# Altium PCB DriveSystem_RevA.PcbDoc
Units mil, origin at the board's own origin, x right, y up, seen from the top; angles counter-clockwise.
Board outline 1740 x 1210 mil, 2 copper layers (Top Layer, Bottom Layer); 29 components, 70 nets, 100 pads, 22 vias.
Unrouted connection lines stored in the file: 18.
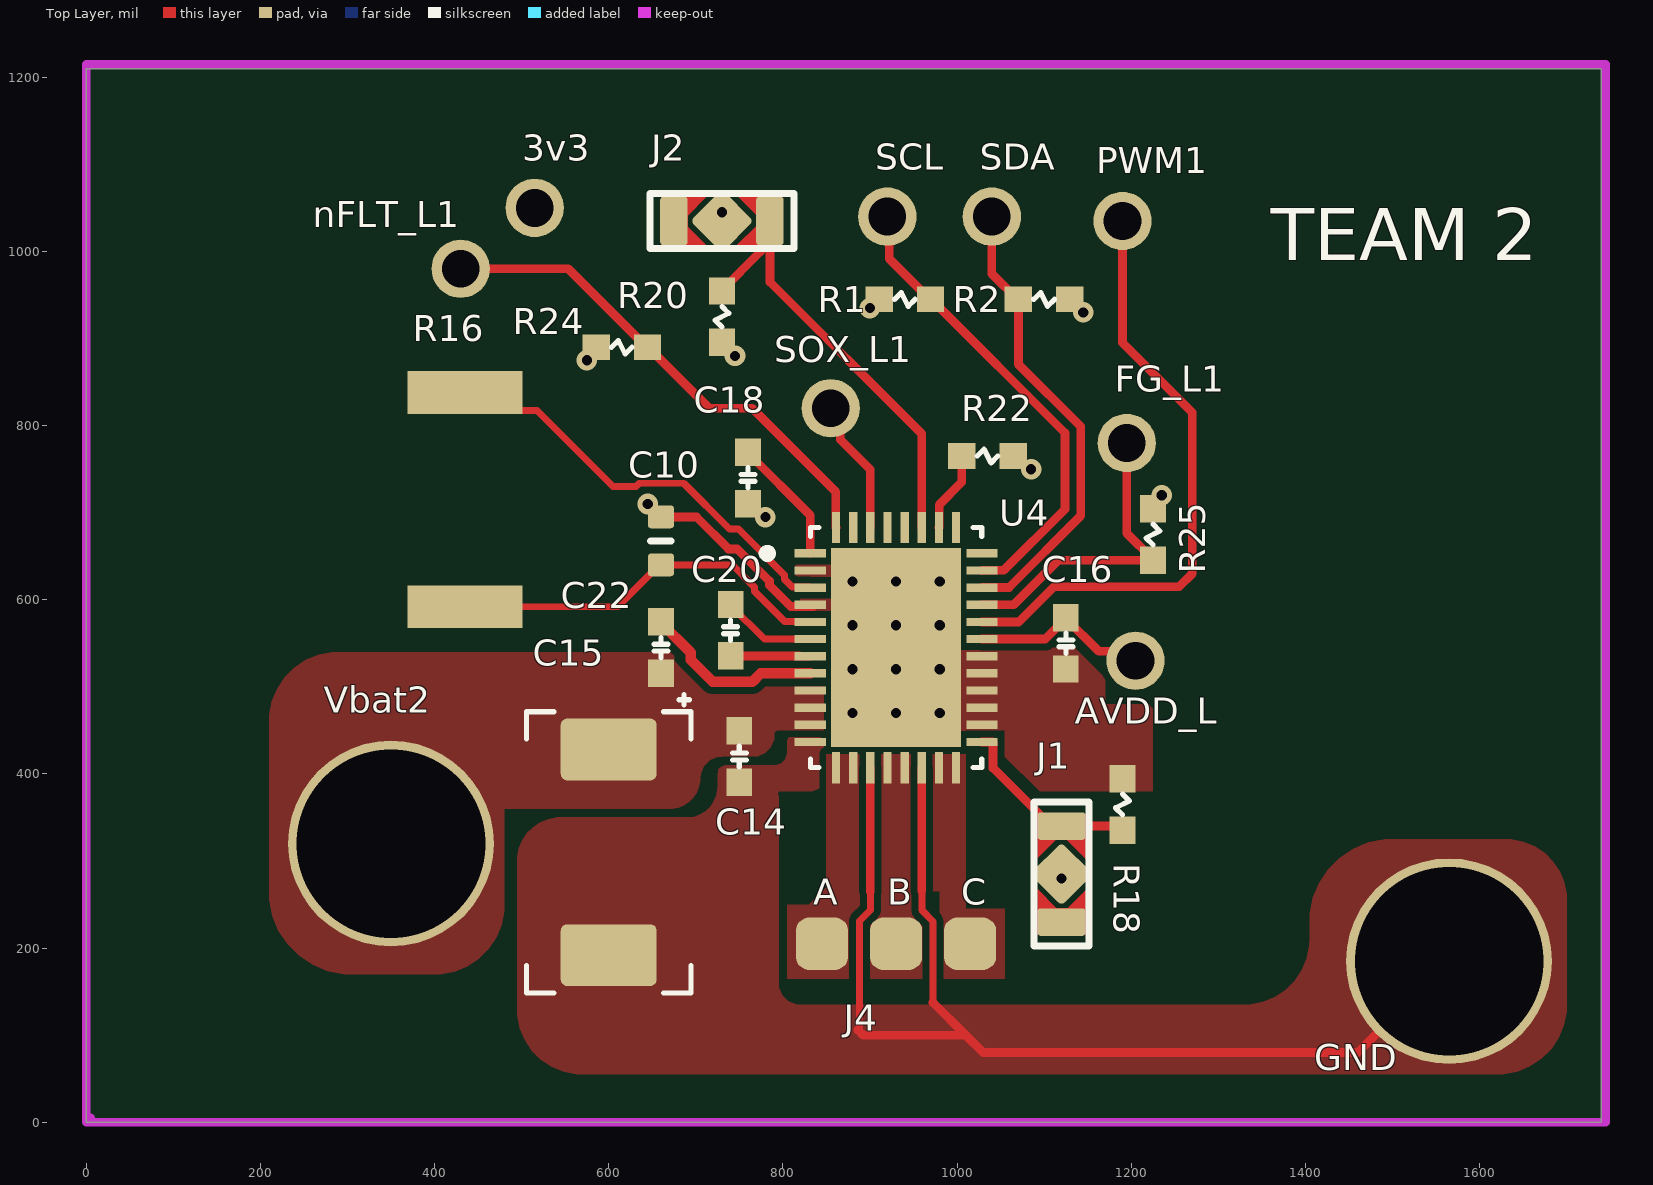
[diagram p0: Top Layer view]
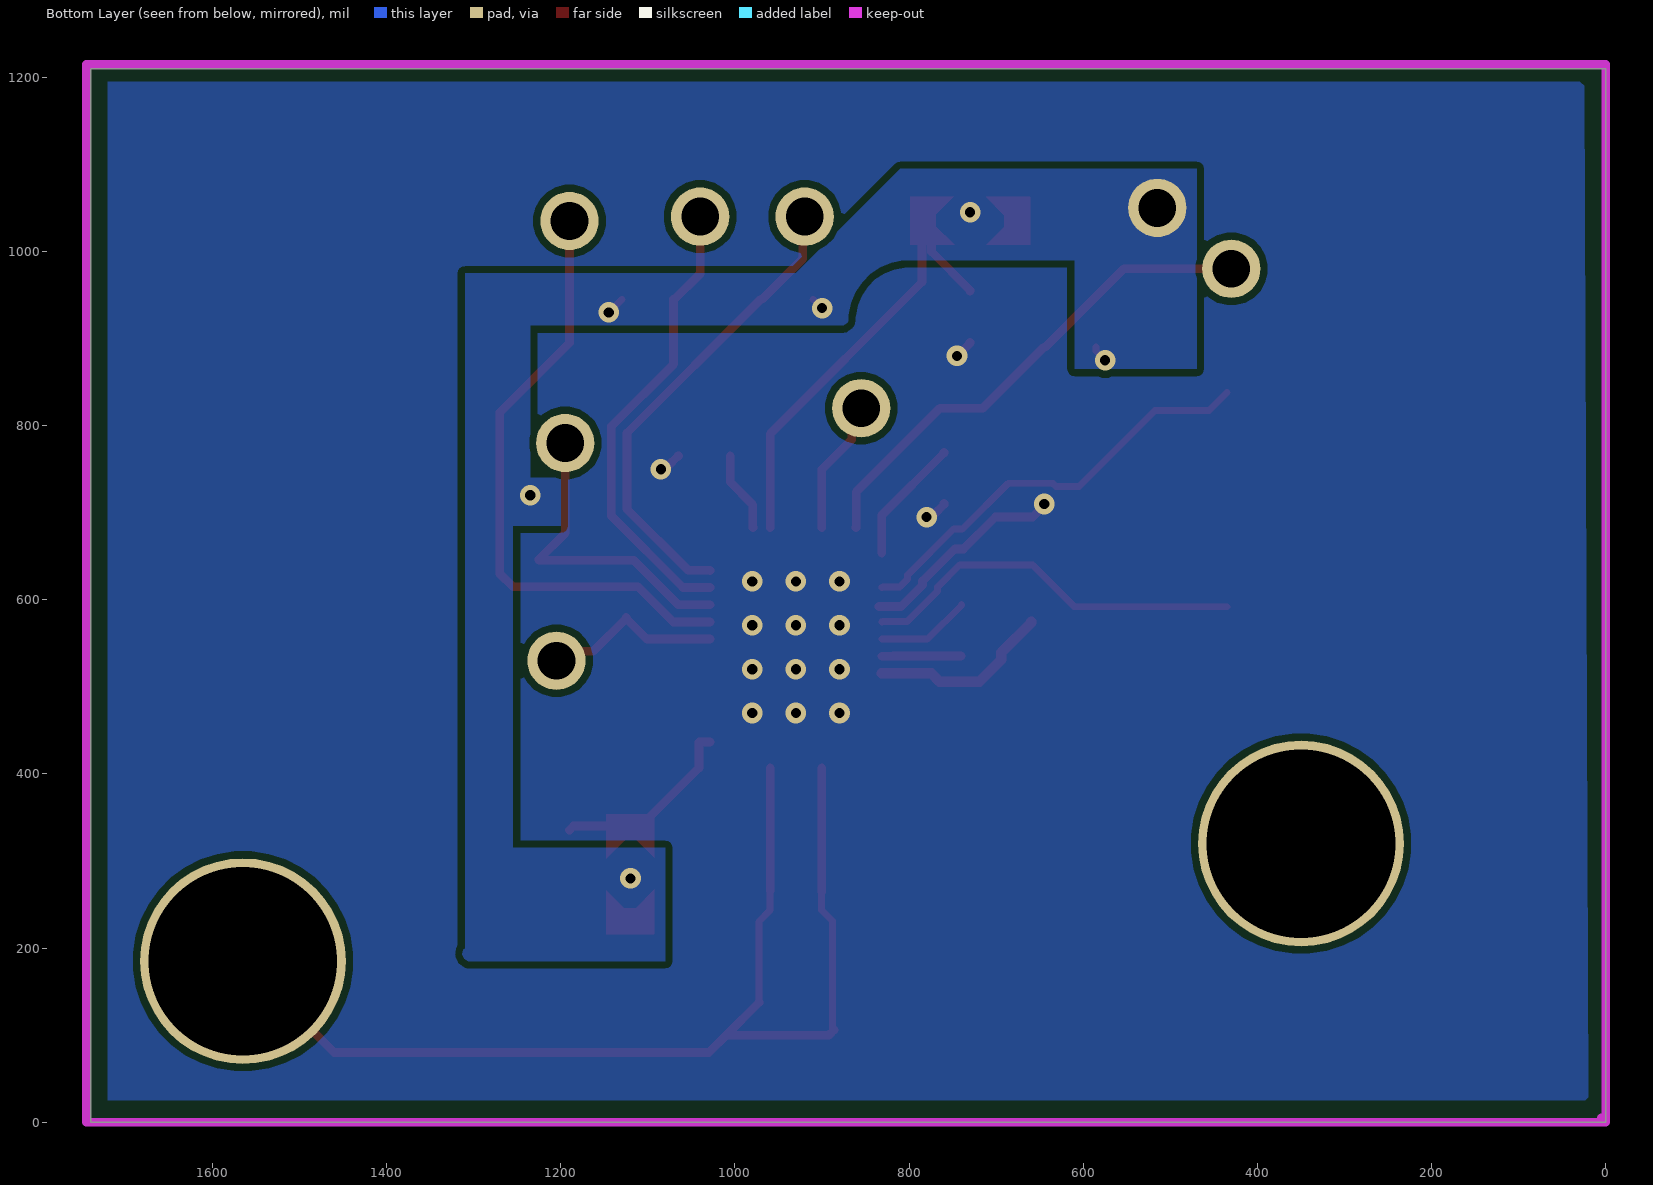
[diagram p1: Bottom Layer view, seen from below]
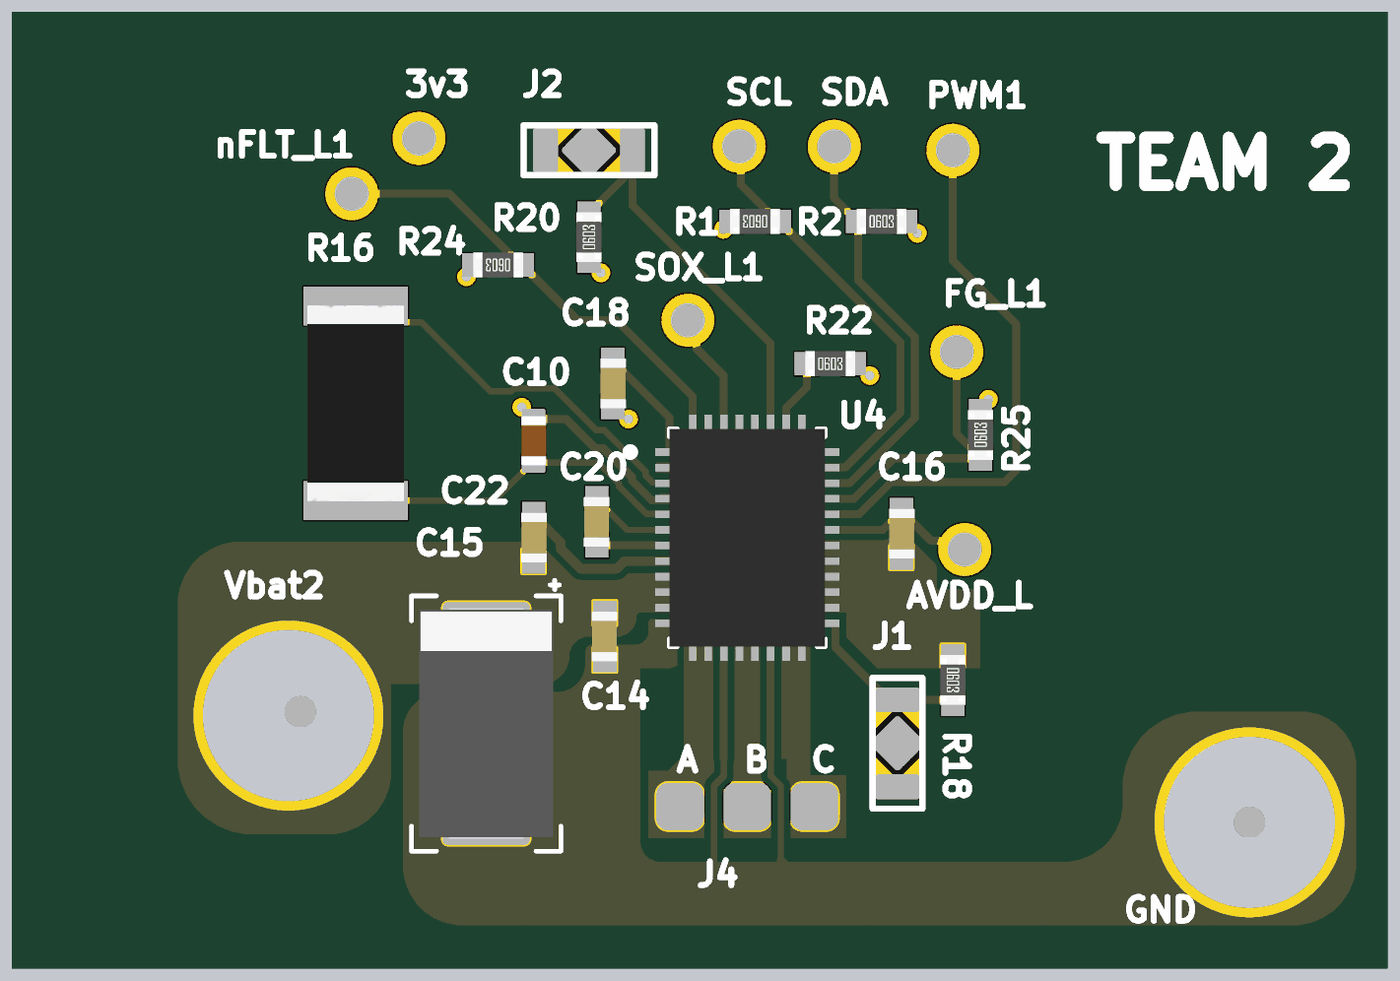
[diagram p2: 3D render of the assembled board from above, using the file's embedded part models]

## Layer stack, top to bottom
Top Solder: solder mask 0.4, Solder Resist, Dk 3.5
Top Layer: signal copper 1.4
Dielectric 1: dielectric 12.6, FR-4, Dk 4.8
Bottom Layer: signal copper 1.4
Bottom Solder: solder mask 0.4, Solder Resist, Dk 3.5

## Board outline
0,0 1740,0 1740,1210 0,1210

## Design rules (kind name [scope] priority, off if disabled: settings)
BoardOutlineClearance [All] p1: gap=7.87 ignorepadtopadclearanceinfootprint=FALSE
Clearance [All] p1: gap=8 ignorepadtopadclearanceinfootprint=TRUE except(10: Arc-Hole Track-Hole SMDPad-Hole THPad-Hole Via-Hole Fill-Hole Poly-Hole Region-Hole Text-Hole)
ComponentClearance [All] p1: gap=5 collisioncheckmode=3 verticalgap=5 showdistances=TRUE
DiffPairsRouting [All] p1: maxlimit=15 minlimit=8 mostfreqgap=8 toplayer_minwidth=8 toplayer_maxwidth=1000 toplayer_prefwidth=8 bottomlayer_minwidth=8 bottomlayer_maxwidth=1000 bottomlayer_prefwidth=8 maxuncoupledlength=500
Height [All] p1: minheight=0 maxheight=71497.94 prefheight=500
HoleSize [All] p1: absolutevalues=TRUE maxlimit=248.03 minlimit=11.81 maxpercent=80.000 minpercent=20.000
HoleToHoleClearance [All] p1: gap=10 allowstackedmicrovias=FALSE
MinimumAnnularRing [All] p1: minimumring=6
MinimumSolderMaskSliver [All] p1: minsoldermaskwidth=6
PlaneClearance [All] p1: clearance=8
PlaneConnect PlaneConnectPowerPads [InPadClass('PowerPads')] p1: planeconnectstyle=Direct reliefexpansion=20 reliefentries=4 reliefconductorwidth=10 reliefairgap=10
PlaneConnect [All] p2: pad.planeconnectstyle=Relief pad.reliefexpansion=11.81 pad.reliefentries=4 pad.reliefconductorwidth=8 pad.reliefairgap=8 via.planeconnectstyle=Direct via.reliefexpansion=11.81 via.reliefentries=4 via.reliefconductorwidth=5 via.reliefairgap=5
PolygonConnect PolygonConnect_1 [All vs IsNamedPolygon('A_GND_L_L01_P009') Or IsNamedPolygon('GND_L01_P008') Or IsNamedPolygon('NETJ4_A_L01_P001') Or IsNamedPolygon('NETJ4_B_L01_P002') Or IsNamedPolygon('NETJ4_C_L01_P003') Or IsNamedPolygon('VBAT_L01_P004') Or IsNamedPolygon('+3V3_L02_P006') Or IsNamedPolygon('A_GND_L_L02_P010')] p1: connectstyle=Direct reliefconductorwidth=10 reliefentries=4 polygonreliefangle="90 Angle" airgapwidth=10
PolygonConnect PolygonConnectPowerPads [All vs (InPadClass('PowerPads'))] p2: connectstyle=Direct reliefconductorwidth=10 reliefentries=4 polygonreliefangle="90 Angle" airgapwidth=10
PolygonConnect [All] p3: thpad.connectstyle=Relief thpad.reliefconductorwidth=8 thpad.reliefentries=4 thpad.polygonreliefangle="90 Angle" thpad.airgapwidth=8 smdpad.connectstyle=Relief smdpad.reliefconductorwidth=8 smdpad.reliefentries=4 smdpad.polygonreliefangle="90 Angle" smdpad.airgapwidth=8 via.connectstyle=Direct via.reliefconductorwidth=5 via.reliefentries=4 via.polygonreliefangle="90 Angle" via.airgapwidth=5
RoutingVias [All] p1: holewidth=11.81 width=23.62 viastyle="Through Hole" minholewidth=11.81 minwidth=23.62 maxholewidth=23.62 maxwidth=259.84
SilkToSilkClearance [All] p1: silktosilkclearance=5
SilkToSolderMaskClearance [IsPad] p1: minsilkscreentomaskgap=5 clearancetoexposedcopper=TRUE
SolderMaskExpansion [All] p1: expansion=2 istentingtop=FALSE
UnRoutedNet [All] p1: checkbadconnections=TRUE
Width Power_20mil [All] p1: maxlimit=1000 minlimit=8 preferedwidth=20 minimp=50.000000 maximp=50.000000 favimp=50.000000
Width Power_12mil [All] p2: maxlimit=1000 minlimit=8 preferedwidth=12 minimp=50.000000 maximp=50.000000 favimp=50.000000
Width Width_10mil [All] p3: maxlimit=1000 minlimit=8 preferedwidth=10 minimp=50.000000 maximp=50.000000 favimp=50.000000
Width Width_8mil [All] p4: maxlimit=1000 minlimit=8 preferedwidth=8 minimp=50.000000 maximp=50.000000 favimp=50.000000
19 further rules are at their usual default settings.

## Components (designator, comment, footprint, x,y, rotation, side; value= is the part's Value field where it differs from the comment)
3v3 "Testpoint" Testpoint 515,1050 r90 top
AVDD_L "Testpoint" Testpoint 1205,530 r90 top
C10 "1uF" CAPC0603(1608)100_L 660,667.56 r90 top
C14 ".1uF" CAP-0603 750,420 r90 top
C15 "10uF" EEF-CX1E330R-Footprint-1 600,310 r270 top
C16 "1uF" CAP-0603 1125,550 r270 top
C18 "1uF" CAP-0603 760,740 r270 top
C20 "47nF" CAP-0603 740,565 r90 top
C22 "1uF" CAP-0603 660,545 r270 top
FG_L1 "Testpoint" Testpoint 1195,780 r90 top
GND "Testpoint" Testpoint 1565,185 r90 top
J1 "DPDT Solder" "DPDT Solder" 1120,285 r270 top
J2 "DPDT Solder" "DPDT Solder" 730,1035 r180 top
J4 "PAD_5x5_3" PAD_5x5_3-Footprint-1 930,205 r0 top
nFLT_L1 "Testpoint" Testpoint 430,980 r90 top
PWM1 "Testpoint" Testpoint 1190,1035 r90 top
R1 "5.1k" RES-0603 940,945 r180 top
R2 "5.1k" RES-0603 1100,945 r0 top
R16 "22o/2512" RES-2512 435,715 r90 top
R18 "10k" RES-0603 1190,365 r270 top
R20 "10k" RES-0603 730,925 r90 top
R22 "10k" RES-0603 1035,765 r0 top
R24 "5.1k" RES-0603 615,890 r180 top
R25 "5.1k" RES-0603 1225,675 r90 top
SCL "Testpoint" Testpoint 920,1040 r90 top
SDA "Testpoint" Testpoint 1040,1040 r90 top
SOX_L1 "Testpoint" Testpoint 855,820 r90 top
U4 "MCF8316A1VRGFR" RGF0040E-IPC_A 930,545 r0 top
Vbat2 "Testpoint" Testpoint 365,325 r90 top

## Footprints (in the part's own frame and the unit in brackets; to place one, negate y for a bottom-side part, rotate by r counter-clockwise, add the part's x,y. Pads: shape width x height; smd on the part's side, far side on the other; paste and mask are expansions set on the pad)
CAP-0603 [mm]
  rect 0.8x0.75 smd: 1(-0.75,0) 2(0.75,0)
  silkscreen extent -0.3,-0.2 0.3,0.2, body extent -0.8,-0.4 0.8,0.42, height 0.81
CAPC0603(1608)100_L [mm] "Chip Capacitor, Body 1.6x0.8mm, Height 1.0mm, IPC High Density"
  rrect25% 0.66x0.76 smd: 1(-0.7,0) 2(0.7,0)
  silkscreen extent 0,-0.3 0,0.3, body extent -0.8,-0.4 0.8,0.4, height 0.95
"DPDT Solder" [mm]
  rrect20% 0.8x1.4 smd mask+0: 1(-1.4,0) 2(1.4,0)
  rrect20% 1.3x1.3 smd rot 45 mask+0: 3(0,0)
  Top Layer region: -1.75,0.7 -0.45,0.7 -1,0.15 -1,-0.175 -0.475,-0.7 -1.75,-0.7
  Top Layer region: 1.75,-0.7 0.45,-0.7 1,-0.15 1,0.175 0.475,0.7 1.75,0.7
  silkscreen extent -2.1,-0.8 2.1,0.8
EEF-CX1E330R-Footprint-1 [mm]
  rrect20% 1.8x2.8 smd: 1(-3,0) 2(3,0)
  silkscreen extent -4.6,-2.4 4.1,2.4, body extent -3.7,-2.15 3.7,2.15, height 1.85
PAD_5x5_3-Footprint-1 [mil]
  rrect50% 60x60 smd: A(-85,0) B(0,0) C(85,0)
RES-0603 [mm]
  rect 0.8x0.75 smd: 1(-0.75,0) 2(0.75,0)
  silkscreen extent -0.3,-0.2 0.3,0.2, body extent -0.8,-0.4 0.8,0.4, height 0.44
RES-2512 [mm]
  rect 1.25x3.35 smd: 1(3.125,0) 2(-3.125,0)
  body extent -3.15,-1.55 3.15,1.55, height 0.55
RGF0040E-IPC_A [mm]
  rect 0.906x0.242 smd paste+0 mask+0: 1(-2.503,2.75) 2(-2.503,2.25) 3(-2.503,1.75) 4(-2.503,1.25) 5(-2.503,0.75) 6(-2.503,0.25) 7(-2.503,-0.25) 8(-2.503,-0.75) 9(-2.503,-1.25) 10(-2.503,-1.75) 11(-2.503,-2.25) 12(-2.503,-2.75) 21(2.503,-2.75) 22(2.503,-2.25) 23(2.503,-1.75) 24(2.503,-1.25) 25(2.503,-0.75) 26(2.503,-0.25) 27(2.503,0.25) 28(2.503,0.75) 29(2.503,1.25) 30(2.503,1.75) 31(2.503,2.25) 32(2.503,2.75)
  rect 0.242x0.906 smd paste+0 mask+0: 13(-1.75,-3.503) 14(-1.25,-3.503) 15(-0.75,-3.503) 16(-0.25,-3.503) 17(0.25,-3.503) 18(0.75,-3.503) 19(1.25,-3.503) 20(1.75,-3.503) 33(1.75,3.503) 34(1.25,3.503) 35(0.75,3.503) 36(0.25,3.503) 37(-0.25,3.503) 38(-0.75,3.503) 39(-1.25,3.503) 40(-1.75,3.503)
  rect 3.8x5.8 smd paste-2.887 mask+0: 41(0,0)
  silkscreen extent -3.88,-3.5 2.5,3.5, body extent -2.5,-3.5 2.5,3.5, height 1
Testpoint [mm]
  round 1 smd: 1(0,0)

## Part data
3v3 AVDD_L FG_L1 GND nFLT_L1 PWM1 SCL SDA SOX_L1 Vbat2: library part CMP-009-000182-1, Design Item ID=Testpoint, Source=ife19_Elec_Library.SchLib
C10: library part CMP-005-000566-1, "Chip Capacitor, 1 uF, +/- 10%, 25 V, 1206 (3216 Metric)", Voltage Rating=25V, Available Preview Images=2D, Design Item ID=CMP-001-00006-4, Pins=1206, Source="Integrated_Library - 12.03.21 - 15.39.SchLib"
C14 C16 C18 C22: library part CMP-009-000303-1, "X5R or X7R, 16V ceramic", Design Item ID=CAP-0603, Source=ife19_Elec_Library.SchLib
C15: library part CMP-005-000585-1, "Aluminum Electrolytic Capacitor, 10 uF, +/- 20%, 50 V, -40 to 85 degC, 2-Pin THD, RoHS, Bulk", Manufacturer=Panasonic, Design Item ID=CMP-001-00025-5, Source="Integrated_Library - 12.03.21 - 15.39.SchLib"
C20: library part CMP-009-000303-1, "X5R or X7R, >32V ceramic", Design Item ID=CAP-0603, Source=ife19_Elec_Library.SchLib
J1 J2: library part CMP-081-000002-1, Design Item ID="DPDT Solder", Source=LTC6811.SchLib
J4: library part CMP-057-000231-1, "3 5x5mm pads", ComponentLink1Description=http://datasheet.octopart.com/172065-0306-Molex-datasheet-101610458.pdf?src-supplier=Farnell, ComponentLink2Description=http://datasheet.octopart.com/172065-0306-Molex-datasheet-96710945.pdf?src-supplier=Farnell, ComponentLink3Description=http://datasheet.octopart.com/172065-0308-Molex-datasheet-101610459.pdf?src-supplier=Farnell, ComponentLink4Description=http://datasheet.octopart.com/172065-0308-Molex-datasheet-96710946.pdf?src-supplier=Farnell
R1 R2 R18 R20 R22 R24 R25: library part CMP-014-000032-1, Design Item ID=RES-0603, Source=ife19_Elec_Library.SchLib
R16: library part CMP-055-000013-1, Design Item ID=RES-2512, Source=ife19_Elec_Library.SchLib
U4: library part CMP-231-000000-2, "No Description Available", Mfr_Name="Texas Instruments", Design Item ID=MCF8316A1VRGFR, RefDes=RefDes, Source=MCF8316A1VRGFR.SchLib, Type=TYPE

## Free pads (board coordinates)
  round 236.22 hole 216.54 paste-99999: 6(350,320) 6(1565,185)
  round 66.93 hole 43.31: 7(430,980) 7(515,1050) 7(855,820) 7(920,1040) 7(1040,1040) 7(1190,1035) 7(1195,780) 7(1205,530)

## Via types
v1: diameter 23.62, hole 11.81, Top Layer to Bottom Layer, 22 vias

## Nets (pads, with @x,y where several pads share a name; then routed paths per layer and width w, separated by ;. In a path a pad name is that pad's centre, name@x,y a point inside that pad or via, vN(x,y) a via of type N, cw(c..) or ccw(c..) an arc to the next point about the centre after c; other vN are vias at no path point)
+3V3: 3v3.1 J1.3 J2.3 pad.7@515,1050 R1.2 R2.2 R24.2 R25.2 | length 55.6
  Top Layer w8: v1(575,875) 585.47,885.47 R24.2 ; v1(900,935) 910,945 R1.2 ; R2.2 1130,945 v1(1145,930)
  other v1: 1120,280 1235,720 730,1045
A_GND_L: C10.2 C16.2 C18.2 R18.1 R20.1 R22.2 U4.2 U4.4 U4.22 U4.23 U4.24 U4.25 U4.26 U4.41 | length 318.2
  Top Layer w10: v1(645,710) 645,708.16 658.04,695.12 C10.2 700.84,695.12 737.68,658.28 747.78,658.28 784.62,621.43 784.62,616.8 809.12,592.3 U4.4@835,592.3 ; R20.1 730,894.49 744.49,880 v1(745,880) ; C18.2 760,709.49 771.88,697.61 777.39,697.61 v1(780,695) ; R22.2 1065.51,765 1077.91,752.61 1082.39,752.61 v1(1085,750)
  other v1: 880,470 930,470 980,470 880,520.35 930,520.35 980,520.35 880,570.71 930,570.71 980,570.71 880,621.06 930,621.06 980,621.06
A_GND_R: 
A_GND_W: 
A_VDD: 
GHA: 
GHB: 
GHC: 
GLA: 
GLB: 
GLC: 
GND: C14.1 C15.2 GND.1 pad.6@1565,185 U4.12 U4.15 U4.18 | length 1367.9
  Top Layer w8: 886.33,105.86 888,107.53 888,231.18 900.47,243.66 900.47,265 ; 959.53,265.47 959.53,243.66 972.5,230.68 972.5,137.5
  Top Layer w10: 886.33,105.86 892.19,100 1010,100 ; 900.47,265 U4.15 ; 959.53,265.47 U4.18 ; 972.5,137.5 1010,100 ; GND.1 1460,80 1030,80 1010,100
LSS: 
NetAVDD_L_1: AVDD_L.1 C16.1 pad.7@1205,530 U4.27 | length 207.4
  Top Layer w10: U4.27 1101.3,554.84 C16.1@1125,578.54 ; C16.1 C16.1@1125,578.54 ; AVDD_L.1 1194.11,540.89 1162.65,540.89 C16.1@1125,578.54
NetAVDD_R_1: 
NetC10_1: C10.1 R16.2 U4.5 | length 446.2
  Top Layer w8: R16.2 610.01,591.97 658.04,640 C10.1 742.01,640 767.62,614.39 767.62,609.76 802.07,575.3 830.68,575.3 U4.5
NetC11_1: 
NetC18_1: C18.1 U4.1 | length 145.9
  Top Layer w10: C18.1 760,768.54 831.46,697.09 U4.1
NetC19_1: 
NetC20_1: C20.1 U4.7 | length 91.6
  Top Layer w10: C20.1 818.53,535.47 818.85,535.16 U4.7
NetC20_2: C20.2 U4.6 | length 108.5
  Top Layer w8: C20.2 740,593.54 778.7,554.84 U4.6
NetC21_1: 
NetC21_2: 
NetC22_1: C22.1 U4.8 | length 209.5
  Top Layer w12: C22.1 660,573.54 694.1,539.44 694.1,531.06 719.44,505.72 765.11,505.72 774.86,515.47 U4.8
NetC23_1: 
NetC24_1: 
NetC25_1: 
NetC25_2: 
NetC27_1: 
NetC30_2: 
NetC31_2: 
NetC32_1: 
NetC33_2: 
NetDACOUT_W1_1: 
NetFG_L1_1: FG_L1.1 pad.7@1195,780 R25.1 U4.29 | length 364.6
  Top Layer w10: U4.29 1065.12,594.21 1116.38,645.47 R25.1 1225,646.46 1195,676.46 FG_L1.1
NetFG_R1_1: 
NetFG_W1_1: 
NetJ1_1: J1.1 R18.2 U4.21 | length 220.7
  Top Layer w10: U4.21 1041.15,436.73 1041.38,436.51 1041.38,406.93 1108.19,340.12 J1.1 1185.35,340.12 R18.2
NetJ2_1: J2.1 R20.2 U4.35 | length 527.6
  Top Layer w10: R20.2 730,955.51 774.37,999.88 774.37,1024.25 J2.1 785.12,964.88 959.53,790.47 U4.35
NetJ3_1: 
NetJ4_A: J4.A U4.13 U4.14
NetJ4_B: J4.B U4.16 U4.17
NetJ4_C: J4.C U4.19 U4.20
NetJ5_A: 
NetJ5_B: 
NetJ5_C: 
NetJ7_1: 
NetJ8_1: 
NetJ9_1: 
NetnFLT_L1_1: nFLT_L1.1 pad.7@430,980 R24.1 U4.40 | length 578.2
  Top Layer w10: nFLT_L1.1 553.54,980 643.54,890 R24.1 645.51,890 715.51,820 765,820 860.88,724.12 860.88,683.14 U4.40
NetnFLT_R1_1: 
NetnFLT_W1_1: 
NetPWM1_1: pad.7@1190,1035 PWM1.1 U4.28 | length 702.6
  Top Layer w10: U4.28 1070.89,574.53 1111.37,615 1255,615 1270,630 1270,815 1190,895 PWM1.1
NetPWM2_1: 
NetR1_1: pad.7@920,1040 R1.1 SCL.1 U4.31 | length 546.3
  Top Layer w10: SCL.1 922.01,1037.99 922.01,991.54 968.54,945 970.51,945 1124,791.51 1124,704 1053.81,633.81 1028.77,633.81 U4.31
NetR2_1: pad.7@1040,1040 R2.1 SDA.1 U4.30 | length 534
  Top Layer w10: U4.30 1028.77,614.12 1059.58,614.12 1142,696.54 1142,798.97 1070.47,870.5 R2.1 1069.49,945 1040,974.49 SDA.1
NetR16_1: R16.1 U4.3 | length 495.2
  Top Layer w8: R16.1 455.61,817.43 517.57,817.43 605,730 631.33,730 635.14,733.81 686.19,733.81 738.86,681.14 748.95,681.14 801.62,628.47 801.62,623.84 810.79,614.67 830.68,614.67 U4.3
NetR17_1: 
NetR22_1: R22.1 U4.34 | length 93
  Top Layer w10: U4.34 979.44,683.14 979.44,709.2 1005.47,735.24 R22.1
NetR23_1: 
NetR30_1: 
NetSOX_L1_1: pad.7@855,820 SOX_L1.1 U4.38 | length 161.4
  Top Layer w10: SOX_L1.1@855,825.48 865.89,814.59 865.89,784.11 900.47,749.53 U4.38
NetSOX_R1_1: 
NetU4_32: U4.32
NetU5_32: 
NetU6_27: 
OUT_WA: 
OUT_WB: 
OUT_WC: 
Vbat: C14.2 C15.1 C22.2 pad.6@350,320 U4.9 U4.10 U4.11 Vbat2.1
pads on no net: J1.2 J2.2 U4.33 U4.36 U4.37 U4.39

## Polygon pours and split planes (outlines as drawn)
A_GND_L on Top Layer "A_GND_L_L01_P009" (solid, pour order 9): 1005,665 850,665 850,645 815,645 815,625 850,625 850,605 820,605 820,585 850,585 850,430 1010,430 1010,450 1055,450 1055,420 1095,380 1225,380 1225,475 1220,480 1170,480 1170,510 1130,550 1125,545 1005,545
GND on Top Layer "GND_L01_P008" (solid, pour order 8): 1700,135 1700,255 ccw(c1630,255) 1630,325 1500,325 ccw(c1500,230) 1405,230 1405,210 cw(c1330,210) 1330,135 820,135 cw(c820,160) 795,160 795,375 cw(c797.07,377.07) 797.07,380 830,380 ccw(c830,400) 850,400 850,430 ccw(c830,430) 830,450 820,450 ccw(c820,435) 805,435 805,425 cw(c790,425) 790,410 735,410 ccw(c735,400) 725,400 725,385 cw(c690,385) 690,350 545,350 ccw(c545,300) 495,300 495,130 ccw(c570,130) 570,55 1620,55 ccw(c1620,135)
NetJ4_C on Top Layer "NETJ4_C_L01_P003" (solid, pour order 3): 970,425 970,265 980,265 980,165 1055,165 1055,245 1010,245 1010,425
NetJ4_B on Top Layer "NETJ4_B_L01_P002" (solid, pour order 2): 910,430 910,255 895,255 895,165 970,165 970,255 950,255 950,430
Vbat on Top Layer "VBAT_L01_P004" (solid, pour order 4): 305,170 400,170 ccw(c400,250) 480,250 480,360 670,360 ccw(c670,395) 705,395 cw(c730,395) 730,420 765,420 ccw(c765,445) 790,445 cw(c795,445) 795,450 855,450 855,500 705,500 675,530 675,540 290,540 ccw(c290,460) 210,460 210,265 ccw(c305,265)
NetJ4_A on Top Layer "NETJ4_A_L01_P001" (solid, pour order 1): 805,250 830,250 850,270 850,430 890,430 890,245 885,245 885,165 805,165
A_GND_L on Bottom Layer "A_GND_L_L02_P010" (solid, pour order 10): 25,1190 30,1195 1720,1195 1720,25 20,25
+3V3 on Bottom Layer "+3V3_L02_P006" (solid, pour order 6): 470,1095 470,865 610,865 610,990 800,990 cw(c800,920) 870,920 870,910 875,915 1235,915 1235,740 1200,740 1200,685 1255,685 1255,315 1080,315 1080,185 1303.79,185 ccw(c1303.79,193.79) 1310,200 1310,975 930,975 810,1095

## Keep-outs
Keep-Out Layer:
  lines w10: 5,5 0,0 ; 0,0 0,1215 1745,1215 1745,0 0,0

## Silkscreen, mask and mechanical layers (free items; w line width, h text height)
Top Overlay:
  text "TEAM 2" at 1360,990 h60

## Text inside footprints (layer, text, board x,y; h text height)
J4: Top Overlay "B" at 920,250 h30; Top Overlay "C" at 1005,250 h30; Top Overlay "A" at 835,250 h30